# Altium PCB pcbgrado.PcbDoc
Units mm, origin at the board's own origin, x right, y up, seen from the top; angles counter-clockwise.
Board outline 100 x 80 mm, 2 copper layers (Top, Bottom); 63 components, 45 nets, 178 pads, 10 vias.
Unrouted connection lines stored in the file: 2.
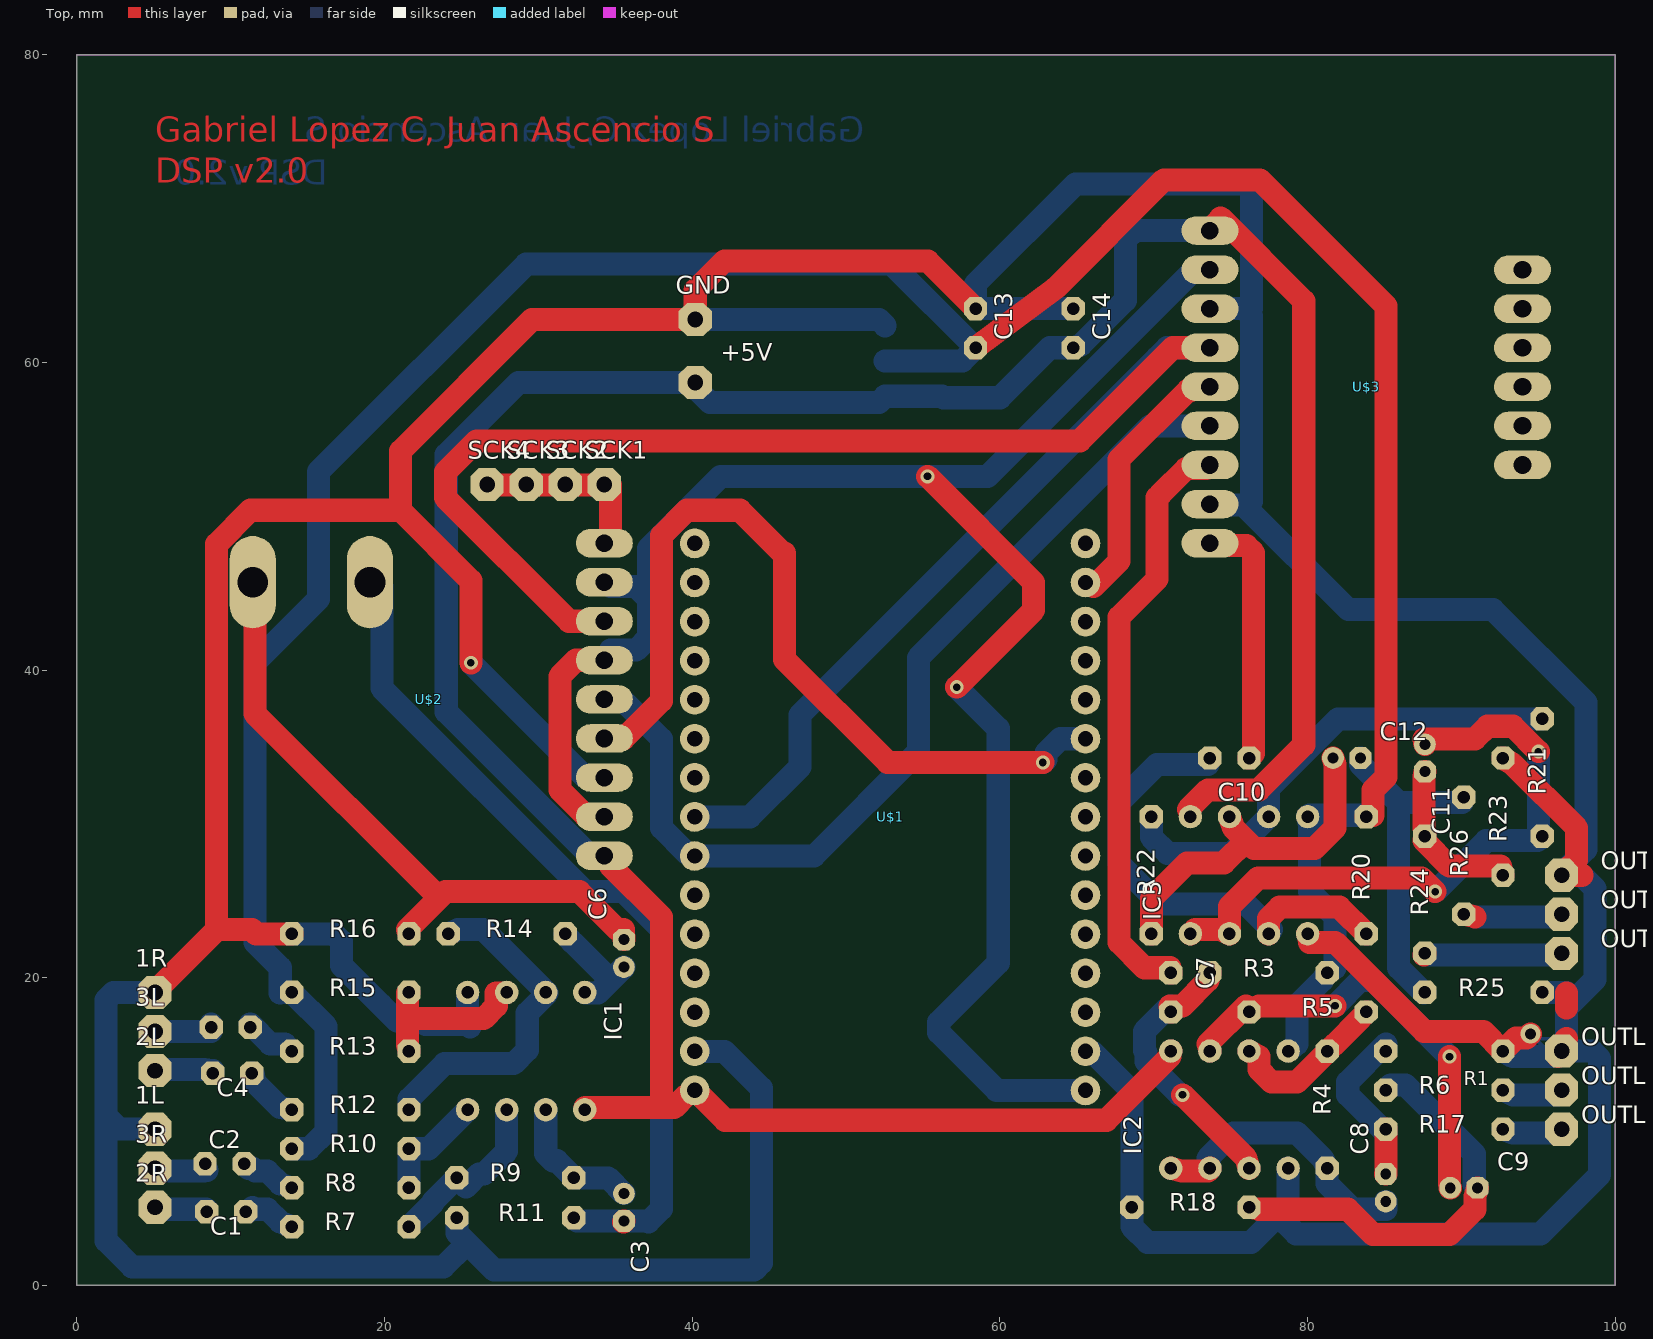
[diagram p0: Top view]
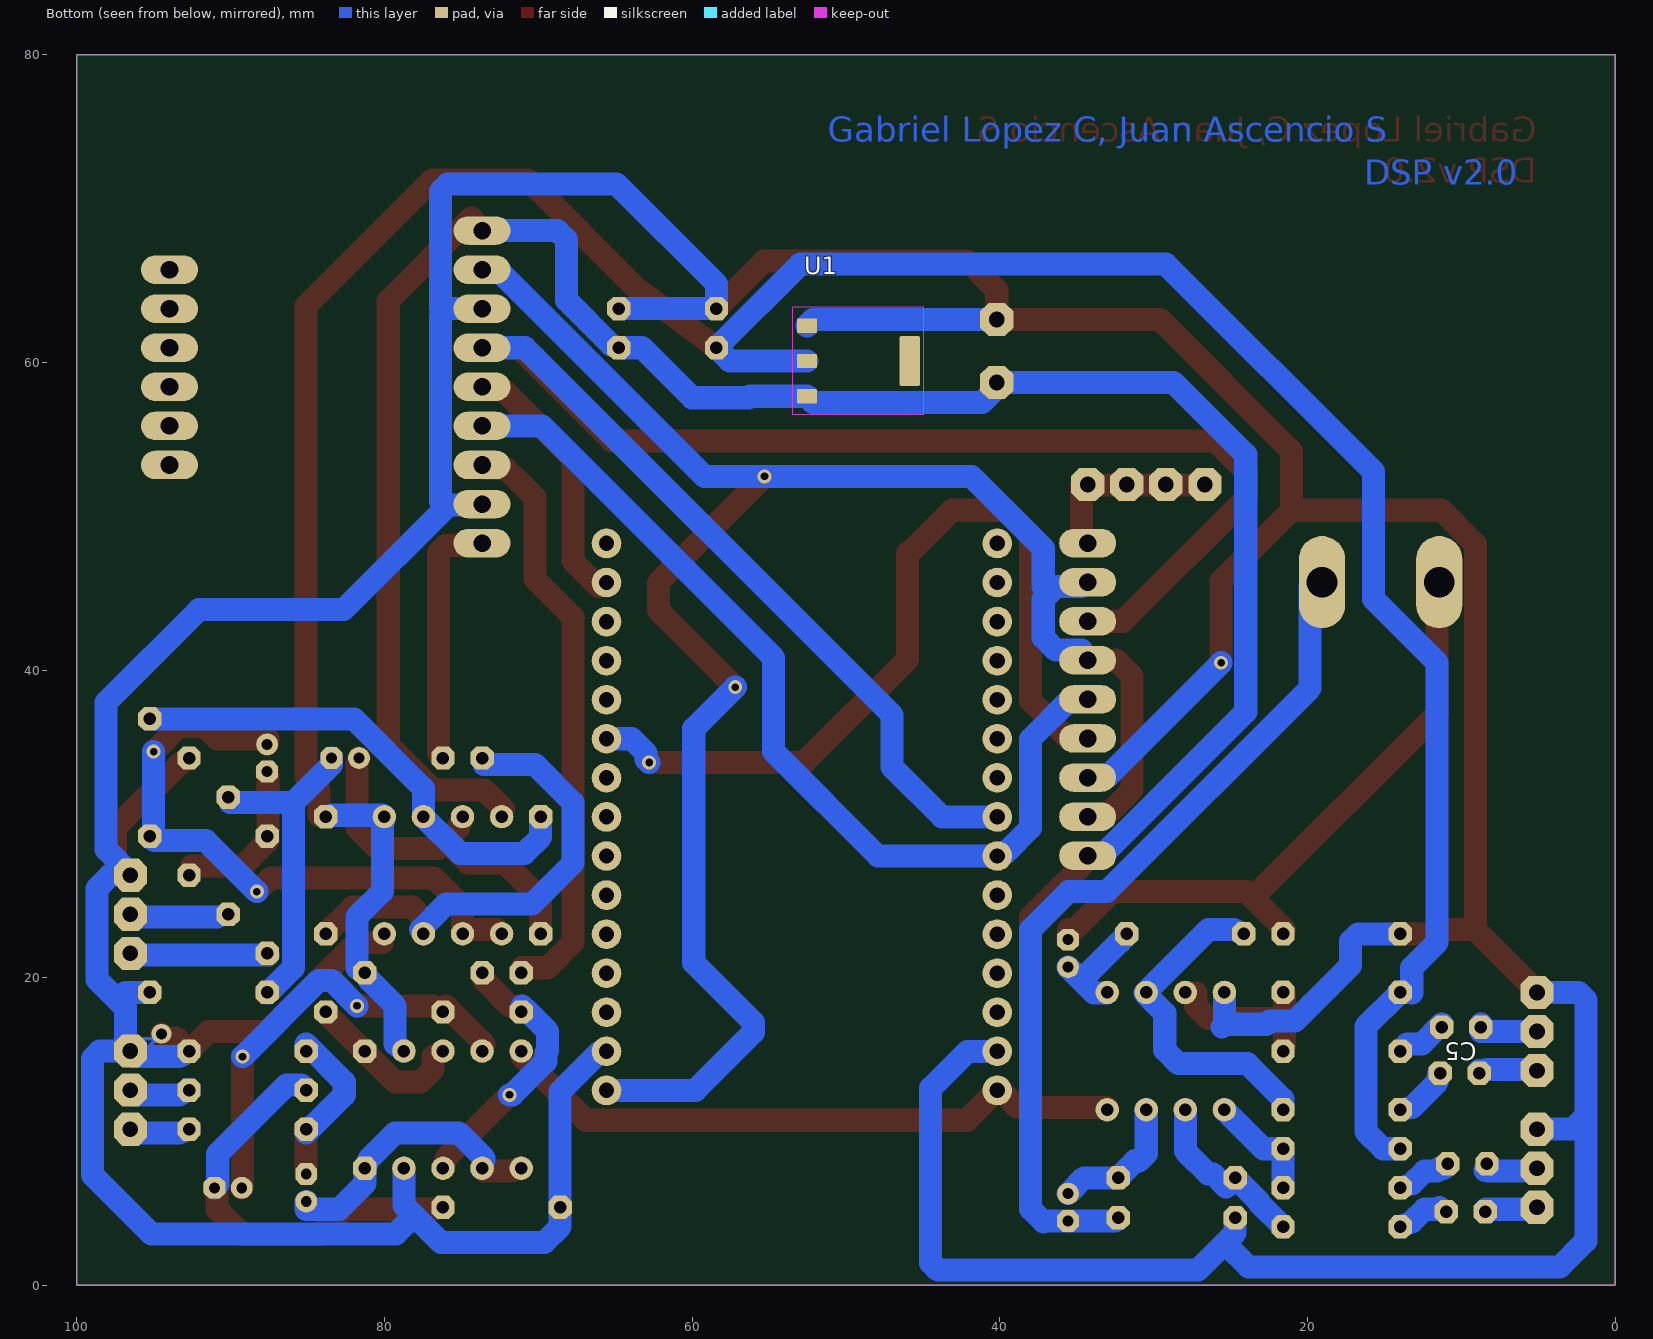
[diagram p1: Bottom view, seen from below]

## Layer stack, top to bottom
Top Solder: solder mask 0.0102, Solder Resist, Dk 3.5
Top: signal copper 0.035
Dielectric 1: dielectric 0.32, FR-4, Dk 4.8
Bottom: signal copper 0.035
Bottom Solder: solder mask 0.0102, Solder Resist, Dk 3.5

## Board outline
0,80 0,0 100,0 100,80

## Design rules (kind name [scope] priority, off if disabled: settings)
BoardOutlineClearance mdCopperDimension [All] p1: gap=0.254 ignorepadtopadclearanceinfootprint=FALSE except(0: Arc-SplitContinuation Track-SplitContinuation SMDPad-SplitContinuation THPad-SplitContinuation Via-SplitContinuation Fill-SplitContinuation Poly-SplitContinuation Region-SplitContinuation Text-SplitContinuation; 1.016: Poly-OutlineEdge Poly-CavityEdge Poly-CutoutEdge Poly-SplitBarrior)
Clearance "Clearance (Same Net)" [All] p1: gap=0.1 ignorepadtopadclearanceinfootprint=FALSE
Clearance [All] p2: gap=0.1 ignorepadtopadclearanceinfootprint=FALSE
HoleSize [All] p1: absolutevalues=TRUE maxlimit=2540 minlimit=0.5 maxpercent=80.000 minpercent=20.000
HoleToHoleClearance mdDrill [All] p1: gap=0.152 allowstackedmicrovias=TRUE
MinimumSolderMaskSliver [All] p1 off: minsoldermaskwidth=0.254
PasteMaskExpansion mlMinCreamFrame [All] p1: expansion=0
PolygonConnect ThermalVias [IsVia] p1: connectstyle=Direct reliefconductorwidth=0.254 reliefentries=4 polygonreliefangle="90 Angle" airgapwidth=0.254
PolygonConnect [All] p2: connectstyle=Relief reliefconductorwidth=0.254 reliefentries=4 polygonreliefangle="90 Angle" airgapwidth=0.254
RoutingVias [All] p1: holewidth=0.5 width=0.907 viastyle="Through Hole" minholewidth=0.5 minwidth=0.907 maxholewidth=2.54 maxwidth=2.54
SolderMaskExpansion mlMinStopFrame [All] p1: expansion=0.102 istentingtop=FALSE
Width [All] p1: maxlimit=3 minlimit=1.5 preferedwidth=1.5 minimp=50.000000 maximp=50.000000 favimp=50.000000
26 further rules are at their usual default settings.

## Components (designator, comment, footprint, x,y, rotation, side; value= is the part's Value field where it differs from the comment)
1L "LSP10" LSP10 5.08,10.16 r0 top
1R "LSP10" LSP10 5.08,19.05 r0 top
2L "LSP10" LSP10 5.08,13.97 r0 top
2R "LSP10" LSP10 5.08,5.08 r0 top
3L "LSP10" LSP10 5.08,16.51 r0 top
3R "LSP10" LSP10 5.08,7.62 r0 top
+5V "LSP10" LSP10 40.2,58.7 r0 top
C1 "" C025-025X050 9.7,4.8 r0 top
C2 "" C025-025X050 9.6,7.9 r0 top
C3 "" E1,8-4 35.56,5.08 r270 top
C4 "" C025-025X050 10.1,13.8 r0 top
C5 "" C025-025X050 10,16.8 r0 bottom
C6 "" E1,8-4 35.56,21.59 r90 top
C7 "" C025-030X050 71.12,19.05 r270 top
C8 "" E1,8-4 85.09,6.35 r90 top
C9 "" E1,8-4 90.17,6.35 r0 top
C10 "" C025-030X050 74.93,34.29 r180 top
C11 "" E1,8-4 87.63,34.29 r270 top
C12 "" E1,8-4 82.55,34.29 r0 top
C13 "" C025-025X050 58.42,62.23 r270 top
C14 "" C025-025X050 64.77,62.23 r270 top
GND "LSP10" LSP10 40.2,62.8 r0 top
IC1 "TL072P" DIL08 29.21,15.24 r180 top
IC2 "TL072P" DIL08 74.93,11.43 r0 top
IC3 "TL072P" DIL08 76.2,26.67 r0 top
OUTL1 "LSP10" LSP10 96.52,15.24 r0 top
OUTL2 "LSP10" LSP10 96.52,10.16 r0 top
OUTL3 "LSP10" LSP10 96.52,12.7 r0 top
OUTR1 "LSP10" LSP10 96.52,26.67 r0 top
OUTR2 "LSP10" LSP10 96.52,21.59 r0 top
OUTR3 "LSP10" LSP10 96.52,24.13 r0 top
R1 "" 0204/7 88.9,12.7 r0 top
R3 "" 0204/7 77.47,20.32 r0 top
R4 "" 0204/7 81.28,11.43 r270 top
R5 "" 0204/7 80.01,17.78 r180 top
R6 "" 0204/7 88.9,15.24 r0 top
R7 "" 0204/7 17.78,3.81 r180 top
R8 "" 0204/7 17.78,6.35 r180 top
R9 "" 0204/7 28.5,7 r180 top
R10 "" 0204/7 17.78,8.89 r180 top
R11 "" 0204/7 28.5,4.4 r180 top
R12 "" 0204/7 17.78,11.43 r180 top
R13 "" 0204/7 17.78,15.24 r180 top
R14 "" 0204/7 27.94,22.86 r180 top
R15 "" 0204/7 17.78,19.05 r180 top
R16 "" 0204/7 17.78,22.86 r180 top
R17 "" 0204/7 88.9,10.16 r0 top
R18 "" 0204/7 72.39,5.08 r180 top
R20 "" 0204/7 83.82,26.67 r90 top
R21 "" 0204/7 95.25,33.02 r270 top
R22 "" 0204/7 69.85,26.67 r270 top
R23 "" 0204/7 92.71,30.48 r90 top
R24 "" 0204/7 87.63,25.4 r270 top
R25 "" 0204/7 91.44,19.05 r0 top
R26 "" 0204/7 90.17,27.94 r270 top
SCK1 "LSP10" LSP10 34.29,52.07 r0 top
SCK2 "LSP10" LSP10 31.75,52.07 r0 top
SCK3 "LSP10" LSP10 29.21,52.07 r0 top
SCK4 "LSP10" LSP10 26.67,52.07 r0 top
U1 "AMS1117-3.3" SOT229P700X180-4N 49.2,60.1 r180 bottom
U$1 "" ESP32-DEVKITV1 53.3,29.2 r90 top
U$2 "" PCM1802PC 19.05,39.37 r0 top
U$3 "" UDA1334A 83.82,57.15 r270 top

## Footprints (in the part's own frame and the unit in brackets; to place one, negate y for a bottom-side part, rotate by r counter-clockwise, add the part's x,y. Pads: shape width x height; smd on the part's side, far side on the other; paste and mask are expansions set on the pad)
0204/7 [mil] "0204/7"
  oct 60x60 / inner round 48.04 / far side oct 60x60 hole 32: 1(-150,0) 2(150,0)
C025-025X050 [mil] "C025-025X050"
  oct 60x60 / inner round 48.04 / far side oct 60x60 hole 32: 1(-50,0) 2(50,0)
C025-030X050 [mil] "C025-030X050"
  oct 60x60 / inner round 48.04 / far side oct 60x60 hole 32: 1(-50,0) 2(50,0)
DIL08 [mil] "DIL08"
  round 60 / inner round 52 / far side round 60 hole 32: 1(-150,-150) 2(-50,-150) 3(50,-150) 4(150,-150) 5(150,150) 6(50,150) 7(-50,150) 8(-150,150)
E1,8-4 [mil] "E1,8-4"
  round 56 / inner round 48 / far side round 56 hole 28: +(-35,0)
  oct 56x56 / inner round 44.35 / far side oct 56x56 hole 28: -(35,0)
ESP32-DEVKITV1 [mil] "ESP32-DEVKITV1"
  round 76 hole 39.37: 3V3(-650.39,-483.07) D1(549.61,-483.07) D2(-350.39,-483.07) D3(449.61,-483.07) D4(-250.39,-483.07) D5(49.61,-483.07) D12(-350.39,517.13) D13(-450.39,517.13) D14(-250.39,517.13) D15(-450.39,-483.07) D16(-150.39,-483.07) D17(-50.39,-483.07) D18(149.61,-483.07) D19(249.61,-483.07) D21(349.61,-483.07) D22(649.61,-483.07) D23(749.61,-483.07) D25(49.61,517.13) D26(-50.39,517.13) D27(-150.39,517.13) D32(249.61,517.13) D33(149.61,517.13) D34(449.61,517.13) D35(349.61,517.13) D36(649.61,517.13) D39(549.61,517.13) EN(749.61,517.13) GND@1(-550.39,517.13) GND@2(-550.39,-483.07) VIN(-650.39,517.13)
LSP10 [mil] "LSP10"
  oct 85x85 / inner round 78.53 / far side oct 85x85 hole 40: MP(0,0)
PCM1802PC [mil] "PCM1802PC"
  oval 146x73 / inner oval 135x67.5 / far side oval 146x73 hole 45: 3.3V(600,-350) +5V(600,-450) BCK(600,-50) DOUT(600,-150) FSY(600,50) GND(600,-250) LRCK(600,150) PDW(600,250) SCK(600,350)
  oval 118.11x236.22 hole 78.74: LIN(-300,250) RIN(0,250)
SOT229P700X180-4N [mm] "SOT229P700X180-4N"
  rrect15% 1.31x0.93 smd: 1(-3.345,2.29) 2(-3.345,0) 3(-3.345,-2.29)
  rrect15% 1.31x3.24 smd: 4(3.345,0)
  Top keep-out lines w0.05: 4.25,-3.502 -4.25,-3.502 -4.25,3.502 4.25,3.502 4.25,-3.502
UDA1334A [mil] "UDA1334A"
  oval 73x146 / inner oval 67.5x135 / far side oval 73x146 hole 45: 3V0(-350,-400) AGND(250,-400) BLCK(50,-400) DEEM(150,400) DIN(-50,-400) GND(-250,-400) LOUT(150,-400) MUTE(-150,400) PLL(50,400) ROUT(350,-400) SCLK(-350,400) SF0(-50,400) SF1(-250,400) VIN(-450,-400) WSEL(-150,-400)

## Part data
C1 C2 C4 C5 C13 C14: library part C025-025X050, PackageName=C025-025X050
C3 C6 C8 C9 C11 C12: library part E1,8-4, PackageName=E1,8-4
C7 C10: library part C025-030X050, PackageName=C025-030X050
IC1 IC2 IC3: library part DIL08, PackageName=DIL08
R1 R3 R4 R5 R6 R7 R8 R9 R10 R11 R12 R13 R14 R15 R16 R17 R18 R20 R21 R22 R23 R24 R25 R26: library part 0204/7, PackageName=0204/7
U1: library part SOT229P700X180-4N, PackageName=SOT229P700X180-4N
U$1: library part ESP32-DEVKITV1, PackageName=ESP32-DEVKITV1
U$2: library part PCM1802PC, PackageName=PCM1802PC
U$3: library part UDA1334A, PackageName=UDA1334A
1L 1R 2L 2R 3L 3R +5V GND OUTL1 OUTL2 OUTL3 OUTR1 OUTR2 OUTR3 SCK1 SCK2 SCK3 SCK4: PackageName=LSP10

## Via types
v1: diameter 0.907/0.907 (per signal layer), hole 0.5, Top to Bottom, 8 vias
v2: diameter 1.27, hole 0.711, Top to Bottom, 1 vias
v3: diameter 0.907, hole 0.5, Top to Bottom, 1 vias

## Nets (pads, with @x,y where several pads share a name; then routed paths per layer and width w, separated by ;. In a path a pad name is that pad's centre, name@x,y a point inside that pad or via, vN(x,y) a via of type N, cw(c..) or ccw(c..) an arc to the next point about the centre after c; other vN are vias at no path point)
1: C10.2 IC3.3 R20.1 | length 31.6
  Top w1.5: IC3.3 77.47,23.87 78.2,24.6 82.08,24.6 R20.1
  Bottom w1.5: C10.2 73.532,33.874 70.227,33.874 67.748,31.396 67.748,27.452 70.414,24.786 76.011,24.786 77.663,23.134 IC3.3
2: C7.2 IC2.3 R3.1 | length 18.4
  Top w1.5: C7.2 71.053,18.176 71.879,18.176 73.532,19.829 R3.1 ; v1(71.879,12.393) 76.011,8.262 IC2.3
  Bottom w1.5: C7.2@70.888,18.012 69.401,16.524 69.401,15.262 69.508,15.155 69.508,14.572 71.687,12.393 v1(71.879,12.393) ; C7.2@71.053,18.176 C7.2
3.3V: U$1.3V3 U$2.3.3V U$2.FSY U$2.PDW U$3.3V0 | length 125.6
  Top w1.5: U$2.3.3V 33.874,30.569 33.048,30.569 31.396,32.222 31.396,38.832 31.396,39.596 32.445,40.645 34.285,40.645 U$2.FSY ; v1(55.3,52.6) 62.2,45.7 62.2,43.9 v1(57.2,38.9)
  Bottom w1.5: U$2.FSY 34.7,41.31 36.353,41.31 37.179,42.136 37.179,44.615 36.766,45.028 ; U$2.PDW 34.7,45.441 36.353,45.441 36.766,45.028 ; v1(57.2,38.9) 59.9,36.2 59.9,20.981 56.031,17.112 56.031,16.45 59.801,12.68 U$1.3V3 ; U$3.3V0 72.65,66.04 59.21,52.6 v1(55.3,52.6) 41.859,52.6 37.179,47.92 37.179,45.441 36.766,45.028
+2.5V: C13.2 IC2.5 IC3.5 R3.2 R10.2 R15.2 R20.2 U1.2 | length 195.8
  Top w1.5: C13.2 63.629,64.837 70.671,71.879 76.898,71.879 85.099,63.679 85.099,33.048 84.272,32.222 84.272,30.569 R20.2
  Bottom w1.5: R10.2 13.982,8.89 15.09,8.89 16.2,10 16.2,16.848 14.045,19.003 R15.2 13.219,19.003 13.219,20.655 11.567,22.307 11.567,40.484 15.7,44.617 15.7,52.9 29.2,66.4 52.98,66.4 C13.2 57.56,60.1 U1.2 ; IC2.5 79.315,15.698 79.315,18.176 80.968,19.829 R3.2 81.794,20.655 81.794,23.96 80.141,25.612 80.141,29.743 IC3.5 80.141,30.569 83.446,30.569 R20.2
+5V: +5V.MP C14.2 IC1.8 IC2.8 IC3.8 U1.3 U$1.VIN U$2.+5V U$3.VIN | length 196.3
  Top w1.5: IC1.8 33.048,11.567 38.005,11.567 ; U$2.+5V 34.7,27.265 38.005,23.96 38.005,11.567 ; U$1.VIN 40.195,12.68 40.205,12.69 40.484,12.393 42.136,10.741 66.922,10.741 71.053,14.872 IC2.8 ; U$1.VIN@40.17,12.671 39.658,12.393 38.832,11.567 38.005,11.567 ; IC3.8@72.255,30.945 73.532,32.222 76.837,32.222 79.759,35.144 79.759,64 74.358,69.401 U$3.VIN
  Bottom w1.5: U$2.+5V 33.363,27.94 24.012,37.291 24.012,54.012 28.7,58.7 +5V.MP 40.429,58.471 40.429,58.134 41.163,57.4 52.135,57.4 U1.3 56.227,57.81 56.327,57.71 60.01,57.71 63.26,60.96 C14.2 65.27,61.139 68.166,64.034 68.166,67.981 68.764,68.58 U$3.VIN
BCK: U$1.D26 U$2.BCK U$3.BLCK | length 61.5
  Bottom w1.5: U$2.BCK 34.7,38.005 35.527,38.005 38.005,35.527 38.005,29.743 U$1.D26@39.658,28.091 ; U$1.D26 43.7,27.92 47.92,27.92 54.7,34.7 54.7,40.8 69.78,55.88 U$3.BLCK
DIN: U$1.D22 U$3.DIN | length 17.4
  Top w1.5: U$1.D22 65.6,45.7 65.61,45.71 66.096,45.441 67.748,47.093 67.748,53.703 72.245,58.2 72.417,58.2 72.637,58.42 U$3.DIN
DOUT: U$1.D19 U$2.DOUT | length 55.6
  Top w1.5: U$2.DOUT 34.7,35.527 35.527,35.527 38.005,38.005 38.005,48.746 39.658,50.398 43.1,50.398 45.898,47.6 46,47.6 46,40.7 52.7,34 v3(62.8,34) ; U$1.D19@65.488,35.622 U$1.D19
  Bottom w1.5: v3(62.8,34) 63,34.2 63,34.6 63.94,35.54 U$1.D19
GND: 1L.MP 1R.MP C13.1 C14.1 GND.MP IC1.4 IC2.4 IC3.4 OUTL1.MP OUTR1.MP R6.2 R11.2 R16.2 R18.2 R23.2 R25.2 U1.1 U$1.GND@1 U$1.GND@2 U$2.GND U$3.AGND U$3.GND | length 435.5
  Top w1.5: 1R.MP@5.08,19.125 9.088,23.134 ; 9.088,23.058 9.088,23.134 ; R16.2 11.66,22.86 11.386,23.134 9.088,23.134 ; v1(25.612,40.484) 25.612,45.823 21.037,50.398 ; 40.165,15.22 40.195,15.22 40.205,15.23 ; C13.1 55.32,66.6 42.1,66.6 40.2,64.7 GND.MP 29.6,62.8 21.037,54.237 21.037,50.398 ; 65.57,15.22 65.578,15.22 65.601,15.243 ; U$3.GND@73.532,63.617 U$3.GND ; IC3.4 80.141,22.307 81.794,22.307 87.577,16.524 91.426,16.524 R6.2 93.57,16.1 94.243,16.1 v2(94.5,16.357) ; R23.2 93.36,33.874 97.492,29.743 97.492,27.647 97.109,27.265 OUTR1.MP 97.83,26.67 ; OUTL1.MP@96.283,14.872 OUTL1.MP 96.749,15.469 96.749,15.953 OUTL1.MP@96.834,16.038 ; 96.834,18.034 96.834,19.003 ; 9.088,23.134 9.088,35.881 9.08,35.889 9.08,48.193 11.285,50.398 21.037,50.398
  Bottom w1.5: 1L.MP 2.74,10.16 1.9,11 ; 1R.MP 2.384,19.05 1.9,18.566 1.9,11 ; R16.2 16.716,22.86 17.2,22.376 17.2,20.805 18.584,19.421 19.753,18.253 20.805,17.2 22.45,17.2 22.666,16.984 25.4,16.984 ; R11.2 24.702,4.388 24.702,3.425 25.613,2.513 27.123,1.004 44.031,1.004 44.5,1.473 44.5,12.82 42.1,15.22 40.165,15.22 ; 25.2,2.927 25.2,2.569 23.831,1.2 3.6,1.2 1.9,2.9 1.9,11 ; IC1.4 25.4,16.984 ; 25.567,16.817 25.4,16.984 ; v1(25.612,40.484) 33.048,33.048 33.874,33.048 U$2.GND ; GND.MP 52.135,62.8 U1.1 ; C14.1 C13.1 58.42,65.112 64.908,71.6 75.9,71.6 76.369,71.131 76.369,63.504 76.364,63.5 ; 65.57,15.22 65.652,15.138 66.062,15.138 68.58,12.62 R18.2@68.58,5.092 ; R18.2 68.58,3.82 69.6,2.8 76.332,2.8 78.076,4.544 ; U$3.AGND 73.728,50.732 75.868,50.732 82.655,43.945 92.055,43.945 98.1,37.9 98.1,28.35 96.52,26.77 OUTR1.MP ; U$3.GND 75.9,63.5 ; 76.132,63.268 76.369,63.031 76.369,50.967 76.202,50.8 ; IC2.4 78.74,5.208 78.076,4.544 ; R25.2 96.834,19.05 ; OUTL1.MP 98.512,15.24 98.996,14.756 98.996,7.196 95.157,3.357 79.263,3.357 78.076,4.544 ; OUTL1.MP@96.834,16.038 96.834,18.034 98.7,19.9 98.7,25.8 97.83,26.67
INL: C6.- R16.1 U$2.LIN | length 42.6
  Top w1.5: U$2.LIN 11.567,45.441 11.567,37.179 23.547,25.199 ; R16.1 21.481,23.134 23.547,25.199 ; C6.- 35.527,23.134 35.144,23.134 32.666,25.612 23.96,25.612 23.547,25.199
INR: C3.- R11.1 U$2.RIN | length 56.5
  Top w1.5: C3.-@35.527,4.131 C3.-
  Bottom w1.5: U$2.RIN 19.829,45.441 19.829,38.832 33.048,25.612 35.527,25.612 38.005,23.134 38.005,4.976 37.16,4.131 37.1,4.191 C3.- 32.519,4.191 R11.1
LOUT: C7.1 U$3.LOUT | length 38.6
  Top w1.5: C7.1 71.053,20.655 69.401,20.655 67.748,22.307 67.748,43.448 70.227,45.927 70.227,51.224 70.461,51.459 72.103,53.1 73.42,53.1 73.594,53.273 73.594,53.34 U$3.LOUT
LRCK: U$1.D25 U$2.LRCK U$3.WSEL | length 116.5
  Top w1.5: U$2.LRCK 32.004,43.18 23.96,51.224 23.96,52.877 25.995,54.911 65.208,54.911 71.257,60.96 U$3.WSEL
  Bottom w1.5: U$1.D25 43.76,30.46 47,33.7 47,37.086 48.007,38.093 70.227,60.313 70.874,60.96 U$3.WSEL
N$1: 2L.MP C4.1 | length 4
  Bottom w1.5: 2L.MP 5.34,14.045 8.262,14.045 8.851,13.975 8.851,13.821 C4.1
N$2: 3L.MP C5.1 | length 4.1
  Bottom w1.5: 3L.MP 5.34,16.524 8.262,16.524 8.719,16.514 8.719,16.989 C5.1@8.73,17
N$3: 2R.MP C1.1 | length 3.5
  Bottom w1.5: 2R.MP 5.34,4.957 8.262,4.957 8.394,4.983 8.43,4.947 C1.1
N$4: C1.2 R7.2 | length 3.6
  Bottom w1.5: C1.2 11.15,4.8 11.43,5.08 11.567,4.957 12.393,4.957 13.219,4.131 R7.2
N$5: IC2.6 R4.1 R5.1 | length 10.8
  Top w1.5: IC2.6 76.837,14.872 76.837,14.045 77.663,13.219 79.315,13.219 80.968,14.872 R4.1 81.794,15.698 83.446,17.35 R5.1
N$6: C8.+ IC2.1 IC2.2 R4.2 | length 18.8
  Top w1.5: IC2.1 71.879,7.436 73.532,7.436 IC2.2
  Bottom w1.5: IC2.2 73.532,8.262 75.184,9.914 79.315,9.914 80.968,8.262 R4.2 81.28,6.62 82.943,4.957 85.099,4.957 C8.+
N$7: C9.+ IC2.7 R5.2 | length 28.8
  Top w1.5: IC2.7 73.532,15.698 76.011,18.176 R5.2 76.837,18.176 v1(81.794,18.176) ; v1(89.23,14.872) 89.23,6.61 C9.+
  Bottom w1.5: v1(81.794,18.176) 83.446,19.829 84.272,19.829 v1(89.23,14.872)
N$8: C8.- R6.1 R17.1 | length 11.5
  Top w1.5: C8.- 85.099,7.436 85.099,9.914 R17.1
  Bottom w1.5: R17.1 85.099,9.914 82.62,12.393 82.62,13.219 85.099,15.698 R6.1
N$9: 3R.MP C2.1 | length 3.9
  Bottom w1.5: 3R.MP 5.34,7.436 8.262,7.436 8.45,7.491 8.33,7.611 C2.1
N$10: C2.2 R8.2 | length 3.7
  Bottom w1.5: C2.2 11.15,7.62 11.43,7.62 11.567,7.436 12.393,7.436 13.219,6.61 R8.2
N$11: IC1.6 R7.1 R9.2 | length 10.8
  Bottom w1.5: R7.1 23.14,5.36 23.14,5.45 R9.2 ; 25.29,6.4 26.137,7.247 26.449,7.247 27.94,8.738 IC1.6
N$12: IC1.5 R8.1 R10.1 | length 7.4
  Bottom w1.5: R8.1 R10.1 22.86,8.89 IC1.5
N$13: C3.+ IC1.7 R9.1 | length 9
  Bottom w1.5: IC1.7 30.48,8.576 30.949,8.107 31.203,8.107 R9.1 34.529,7 C3.+
N$14: C5.2 R13.2 | length 3.4
  Bottom w1.5: C5.2@11.27,17 12.572,15.698 13.512,15.698 R13.2
N$15: C4.2 R12.2 | length 3.8
  Bottom w1.5: C4.2 11.442,13.8 11.458,13.816 11.567,13.219 13.219,11.567 R12.2
N$16: IC1.3 R13.1 R15.1 | length 11.5
  Top w1.5: R13.1 21.481,15.698 21.481,17.35 ; R15.1 21.481,19.003 21.481,17.35 ; IC1.3 27.265,19.003 27.265,18.176 26.438,17.35 21.481,17.35
N$17: IC1.2 R12.1 R14.2 | length 22.2
  Bottom w1.5: R12.1 21.59,12.119 23.898,14.428 28.398,14.428 29.278,15.308 29.278,17.712 IC1.2@30.569,19.003 ; R14.2 24.786,23.134 26.438,23.134 IC1.2@30.569,19.003 ; IC1.2 IC1.2@30.569,19.003
N$18: C6.+ IC1.1 R14.1 | length 7.5
  Bottom w1.5: R14.1 32.222,22.307 34.7,19.829 ; IC1.1 33.048,19.003 33.874,19.003 34.7,19.829 ; C6.+ 35.527,20.655 34.7,19.829
N$19: OUTL2.MP R17.2 | length 4
  Bottom w1.5: R17.2 93.36,9.914 96.283,9.914 OUTL2.MP
N$20: C9.- R1.1 R18.1 | length 27.5
  Top w1.5: R18.1 76.837,4.957 82.62,4.957 84.272,3.305 89.23,3.305 90.882,4.957 90.882,5.783 C9.-
  Bottom w1.5: R1.1 85.412,13.022 86.378,13.022 90.842,8.558 90.842,6.567 C9.-
N$21: OUTL3.MP R1.2 | length 4
  Bottom w1.5: R1.2 93.36,12.393 96.283,12.393 OUTL3.MP
N$22: C11.+ IC3.1 IC3.2 R21.2 | length 41.8
  Top w1.5: IC3.1 72.706,23.134 74.358,23.134 IC3.2 74.93,24.63 76.8,26.5 87.4,26.5 v1(88.3,25.6) ; C11.+ 87.577,35.527 90.882,35.527 91.708,36.353 93.36,36.353 v1(95.013,34.7)
  Bottom w1.5: v1(88.3,25.6) 91.617,28.917 94.957,28.917 R21.2 95.013,29.743 v1(95.013,34.7)
N$23: IC3.6 R21.1 R22.1 | length 31.9
  Bottom w1.5: R22.1 69.85,29.15 70.909,28.091 75.081,28.091 IC3.6 77.47,32.307 81.993,36.83 R21.1
N$24: C12.+ IC3.7 R22.2 | length 23.1
  Top w1.5: R22.2 69.85,25.15 72.171,27.471 74.565,27.471 76.011,28.917 ; IC3.7 75.184,29.743 76.011,28.917 ; C12.+ 81.794,33.874 81.794,29.743 80.45,28.4 76.527,28.4 76.011,28.917
N$25: C11.- R23.1 R24.1 | length 10.8
  Top w1.5: C11.- 87.577,33.048 87.577,29.743 R24.1 87.577,28.917 89.23,27.265 92.534,27.265 R23.1
N$26: OUTR2.MP R24.2 | length 9.1
  Top w1.5: R24.2@87.577,21.481 R24.2 ; OUTR2.MP@96.283,21.481 OUTR2.MP
  Bottom w1.5: R24.2@87.577,21.481 OUTR2.MP@96.283,21.481
N$27: C12.- R25.1 R26.1 | length 21.6
  Bottom w1.5: C12.- 83.446,33.874 85.925,31.396 ; R25.1 87.577,19.003 85.925,20.655 85.925,31.396 ; R26.1 90.056,31.396 85.925,31.396
N$28: OUTR3.MP R26.2 | length 6.4
  Top w1.5: R26.2 R26.2@90.882,23.96 ; OUTR3.MP@96.283,23.96 OUTR3.MP
  Bottom w1.5: R26.2@90.882,23.96 OUTR3.MP@96.283,23.96
N$29: U$3.SF0
N$30: U$3.SF1
ROUT: C10.1 U$3.ROUT | length 16.6
  Top w1.5: U$3.ROUT 73.728,48.192 74.905,48.192 74.997,48.1 76.031,48.1 76.5,47.631 76.5,34.59 C10.1
SCK: SCK1.MP SCK2.MP SCK3.MP SCK4.MP U$2.SCK | length 12
  Top w1.5: SCK4.MP 27.265,52.051 28.917,52.051 SCK3.MP 29.743,52.051 31.396,52.051 SCK2.MP 32.222,52.051 33.874,52.051 SCK1.MP 34.7,52.051 34.7,48.746 U$2.SCK
pads on no net: U1.4 U$1.D1 U$1.D2 U$1.D3 U$1.D4 U$1.D5 U$1.D12 U$1.D13 U$1.D14 U$1.D15 U$1.D16 U$1.D17 U$1.D18 U$1.D21 U$1.D23 U$1.D27 U$1.D32 U$1.D33 U$1.D34 U$1.D35 U$1.D36 U$1.D39 U$1.EN U$3.DEEM U$3.MUTE U$3.PLL U$3.SCLK
copper on no net: | length 18.5
  Bottom w0.254: 92.6,15 96.4,15 96.5,14.9 93.05,14.9 93.39,15.24 ; 96.52,15.24 95.617,15.24 94.5,16.357 94.819,16.038 ; 94.819,16.038 96.834,16.038 94.819,16.038
  Bottom w1.5: 92.71,15.24 93.36,14.872 96.283,14.872

## Keep-outs
Keep-Out Layer:
  the board outline again, w0

## Other copper
Top:
  text "Gabriel Lopez C, Juan Ascencio S" at 5.08,73.787 h2.76
  text "DSP v2.0" at 5.08,71.12 h2.76
Bottom:
  text "Gabriel Lopez C, Juan Ascencio S" at 51.2,73.8 h2.76
  text "DSP v2.0" at 16.3,71 h2.76

## Silkscreen, mask and mechanical layers (free items; w line width, h text height)
Dimension:
  the board outline again, w0

## Text inside footprints (layer, text, board x,y; h text height)
U$1: tPlace "3V3" at 63.23,13.34 h0.86 r180; tPlace "GND" at 63.23,15.88 h0.86 r180; tPlace "IO15" at 63.23,18.42 h0.86 r180; tPlace "IO2" at 63.23,20.96 h0.86 r180; tPlace "IO4" at 63.23,23.5 h0.86 r180; tPlace "IO16" at 63.23,26.04 h0.86 r180; tPlace "IO17" at 63.23,28.58 h0.86 r180; tPlace "IO5" at 63.23,31.12 h0.86 r180; tPlace "IO18" at 63.23,33.66 h0.86 r180; tPlace "IO19" at 63.23,36.2 h0.86 r180; tPlace "IO21" at 63.23,38.74 h0.86 r180; tPlace "IO3" at 63.23,41.28 h0.86 r180; tPlace "IO1" at 63.23,43.82 h0.86 r180; tPlace "IO22" at 63.23,46.36 h0.86 r180; tPlace "IO23" at 63.23,48.9 h0.86 r180; tPlace "VIN" at 45.51,13.36 h0.86 r180; tPlace "GND" at 45.51,15.9 h0.86 r180; tPlace "IO13" at 45.51,18.44 h0.86 r180; tPlace "IO12" at 45.51,20.98 h0.86 r180; tPlace "IO14" at 45.51,23.52 h0.86 r180; tPlace "IO27" at 45.51,26.06 h0.86 r180; tPlace "IO26" at 45.51,28.6 h0.86 r180; tPlace "IO25" at 45.51,31.14 h0.86 r180; tPlace "IO33" at 45.51,33.68 h0.86 r180; tPlace "IO32" at 45.51,36.22 h0.86 r180; tPlace "IO35" at 45.51,38.76 h0.86 r180; tPlace "IO34" at 45.51,41.3 h0.86 r180; tPlace "VN/IO39" at 48.05,43.84 h0.86 r180; tPlace "VP/IO36" at 48.05,46.38 h0.86 r180; tPlace "EN" at 45.51,48.92 h0.86 r180; tPlace "ESP32-Devkit V1" at 55.21,30.62 h1.64 r90; Top Value "ESP32-DEVKITV1" at 69.27,40.55 h1.97 r90